# Altium PCB Baskılı_Devre_Proje_2.PcbDoc
Units mm, origin at the board's own origin, x right, y up, seen from the top; angles counter-clockwise.
Board outline 50 x 44.43 mm, 2 copper layers (Top Layer, Bottom Layer); 21 components, 13 nets, 51 pads, 132 vias.
Unrouted connection lines stored in the file: 15.
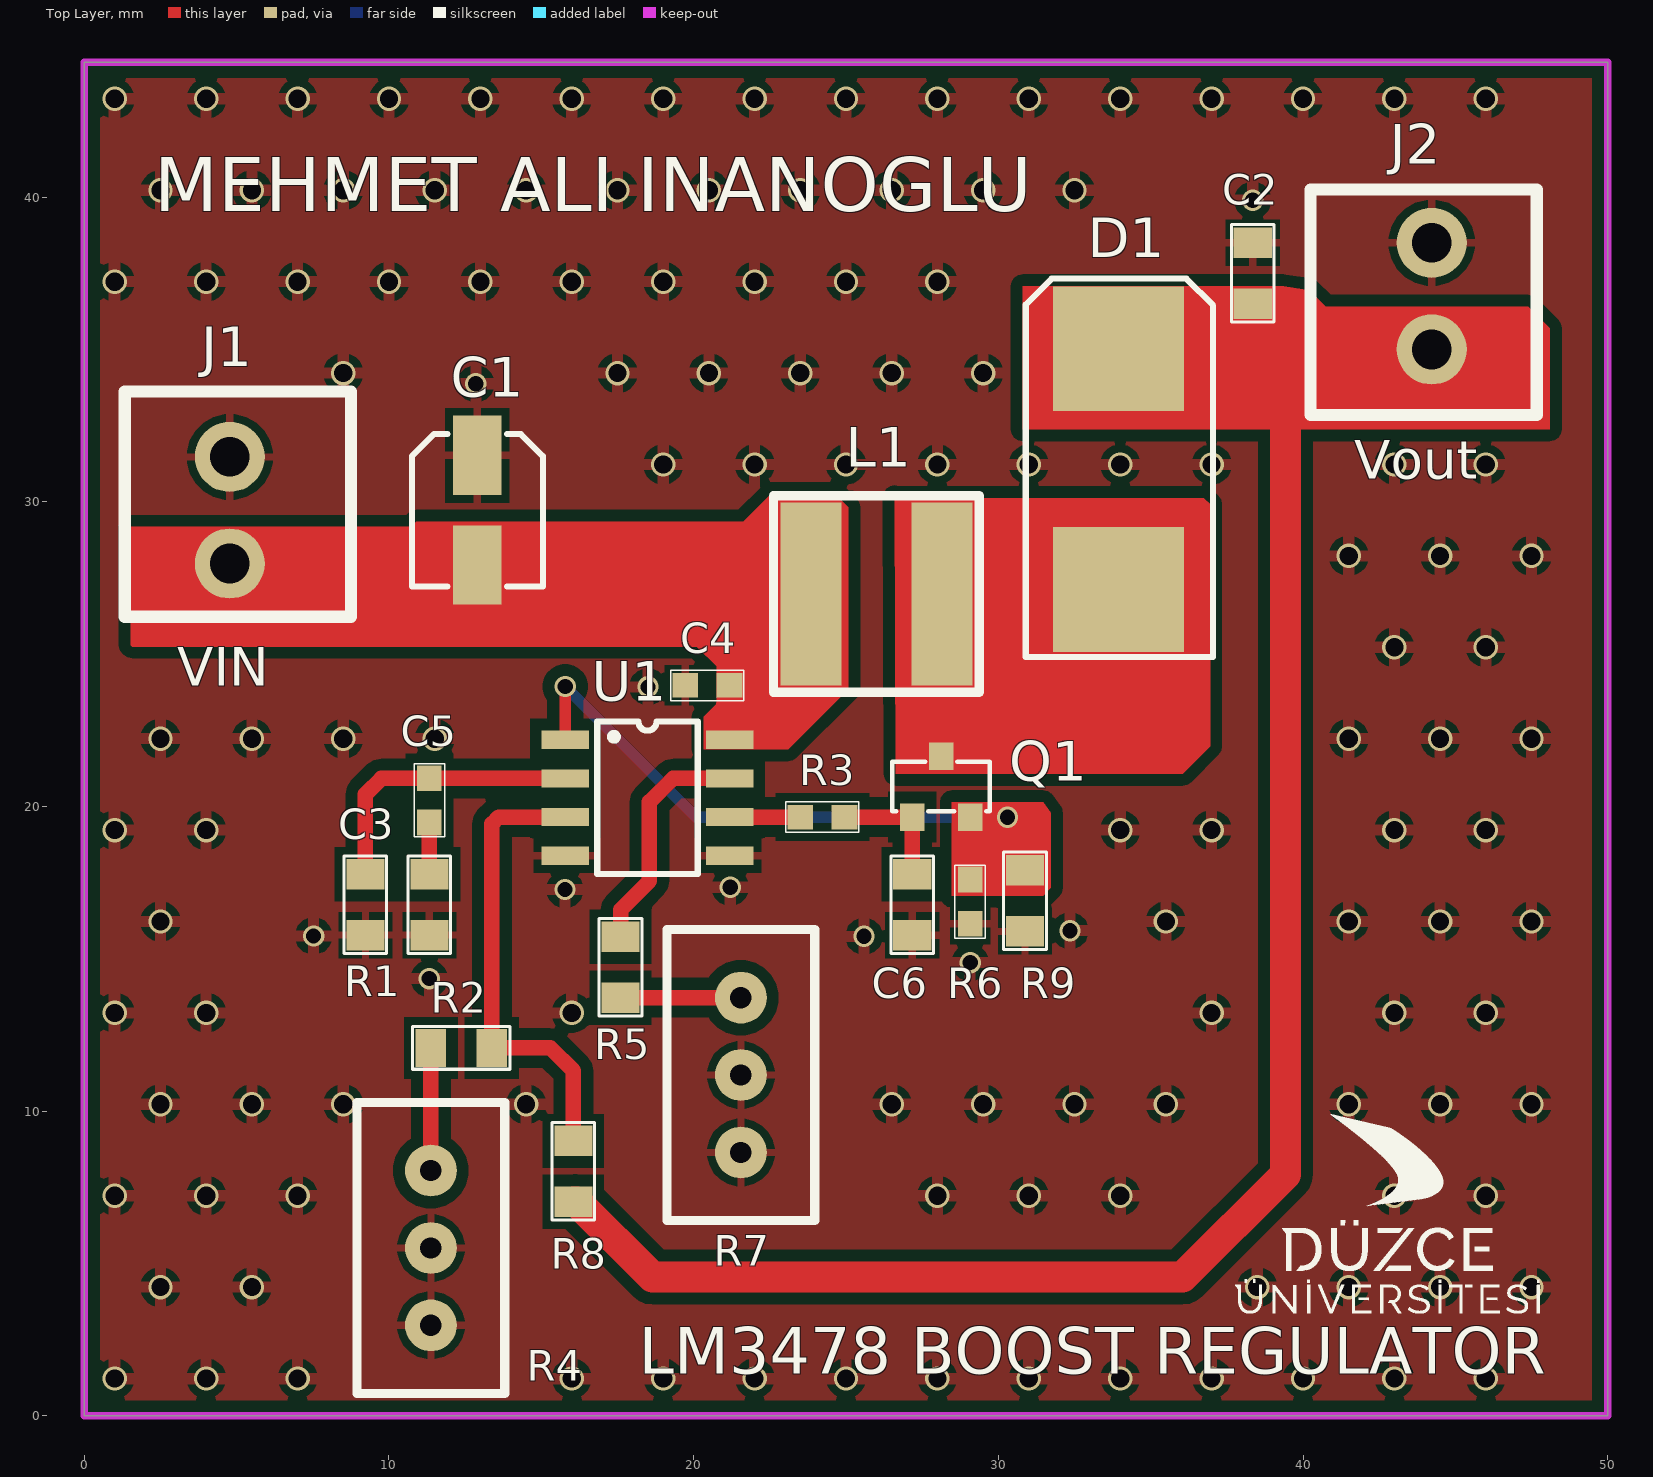
[diagram p0: Top Layer view]
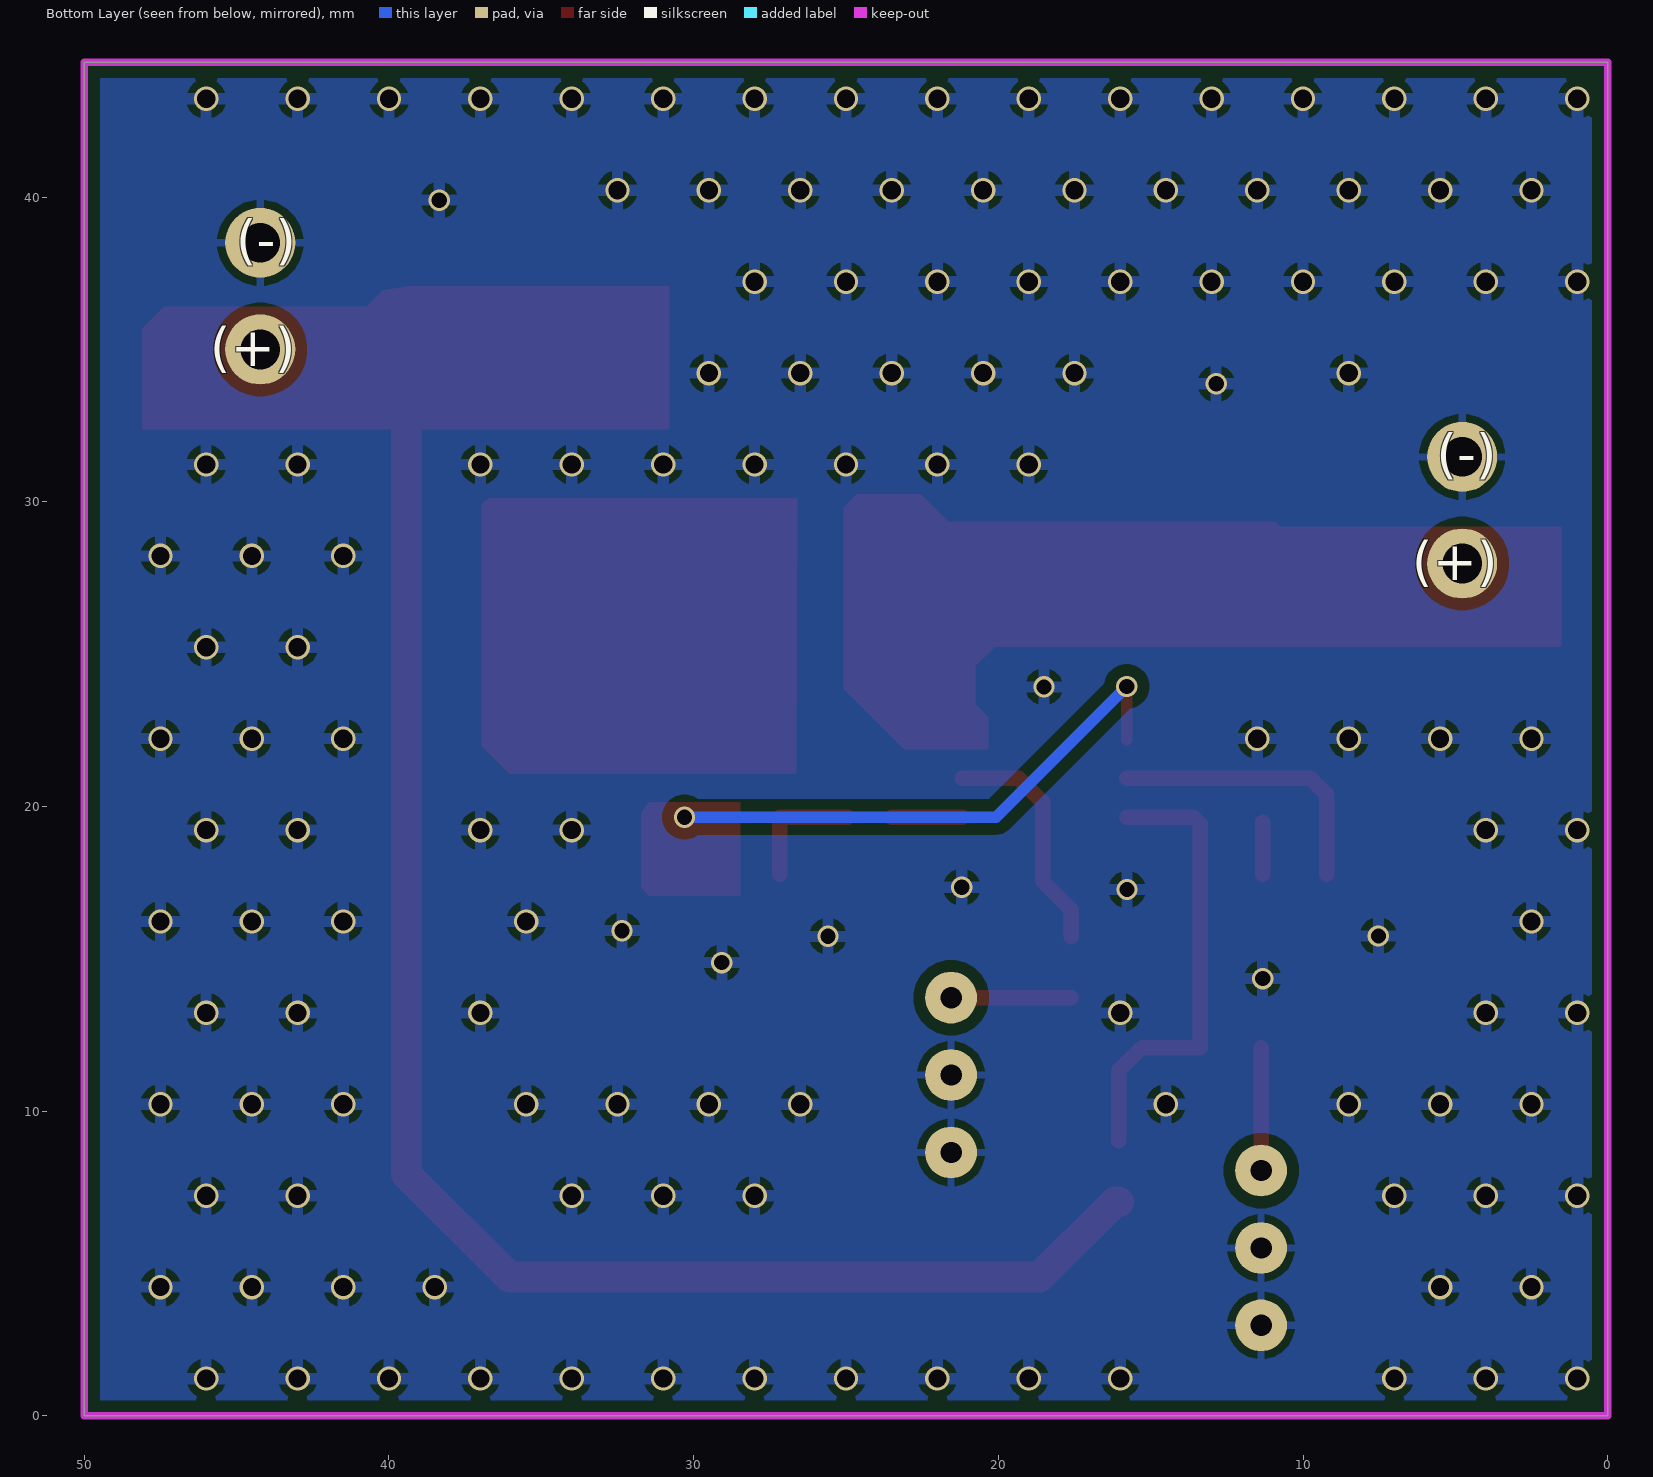
[diagram p1: Bottom Layer view, seen from below]
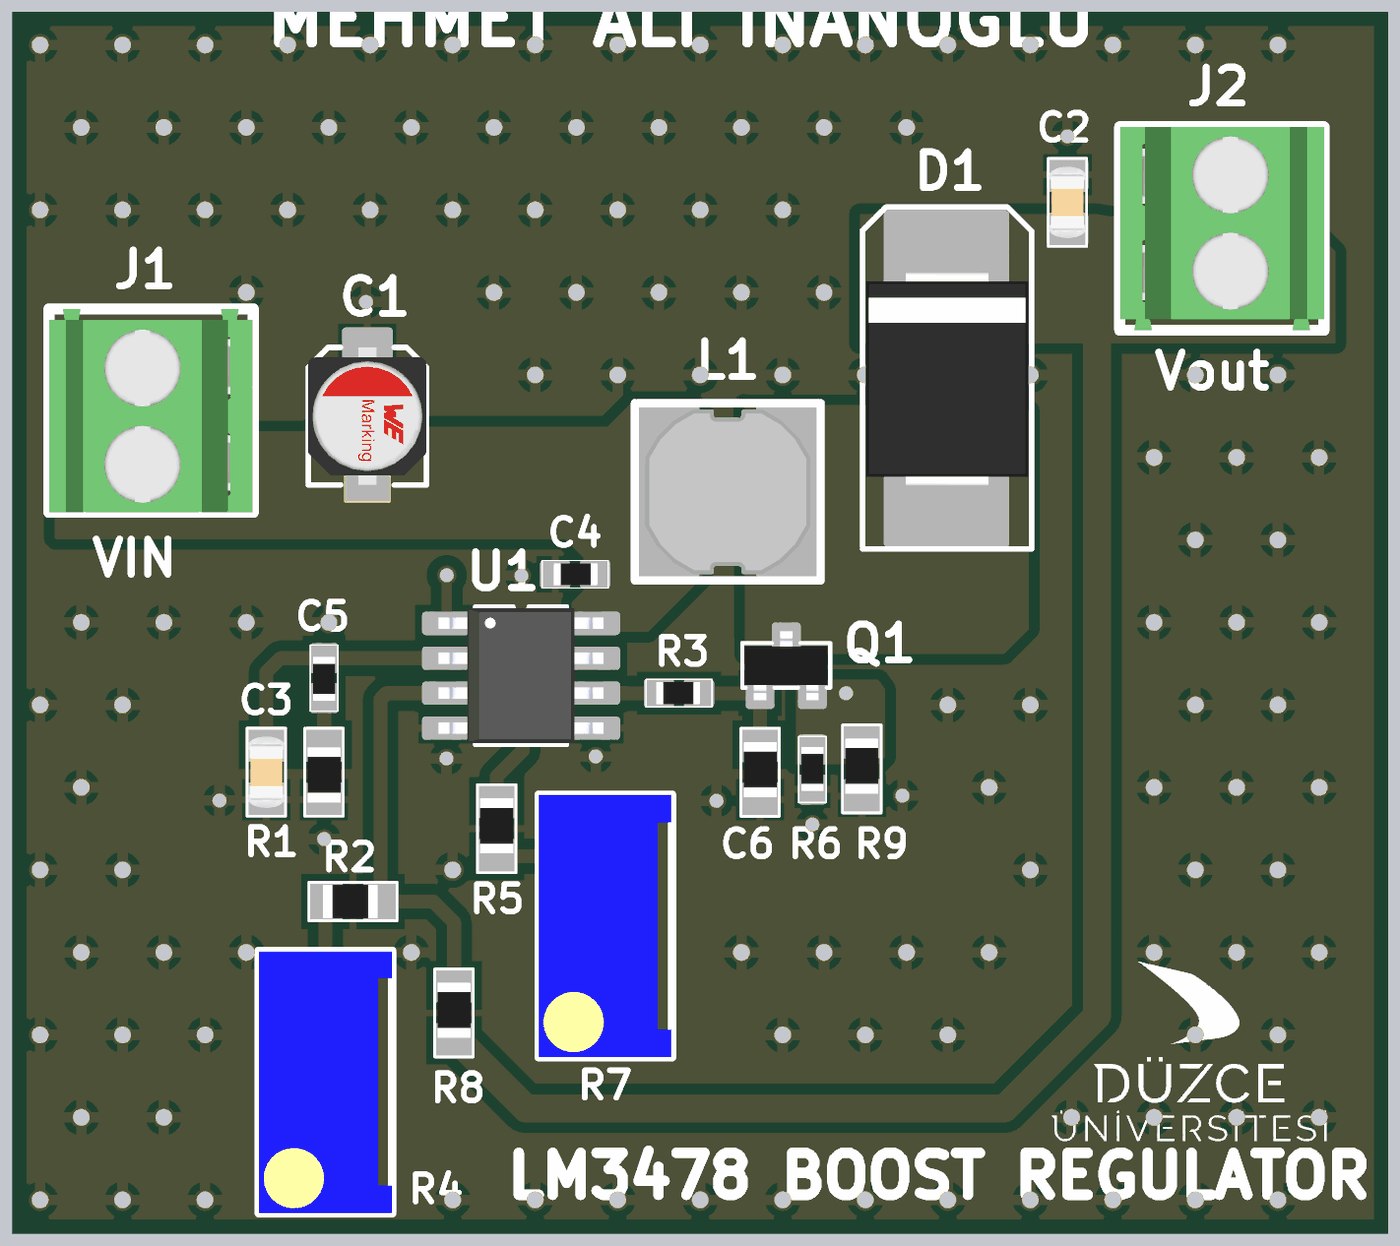
[diagram p2: 3D render of the assembled board from above, using the file's embedded part models]

## Layer stack, top to bottom
Top Solder: solder mask 0.0102, Solder Resist, Dk 3.5
Top Layer: signal copper 0.0356
Dielectric 1: dielectric 0.32, FR-4, Dk 4.8
Bottom Layer: signal copper 0.0356
Bottom Solder: solder mask 0.0102, Solder Resist, Dk 3.5

## Board outline
0,0 50,0 50,44.425 0,44.425

## Design rules (kind name [scope] priority, off if disabled: settings)
Clearance [All] p1: gap=0.381 ignorepadtopadclearanceinfootprint=TRUE except(0: Arc-Text Track-Text SMDPad-Text THPad-Text Via-Text Fill-Text Poly-Text Region-Text Text-Text Text-Hole; 0.203: SMDPad-SMDPad SMDPad-THPad THPad-THPad; 0.229: Arc-Fill Arc-Hole Track-Fill Track-Hole SMDPad-Fill SMDPad-Hole THPad-Fill THPad-Hole Via-Fill Via-Hole Fill-Fill Fill-Hole Poly-Hole Region-Hole; 0.254: Arc-Arc Arc-Track Arc-SMDPad Arc-THPad Arc-Via Track-Track Track-SMDPad Track-THPad Track-Via SMDPad-Via THPad-Via Via-Via)
MinimumSolderMaskSliver [All] p1: minsoldermaskwidth=0.127
NetAntennae [All] p1: netantennaetolerance=0.254
PasteMaskExpansion [All] p1: expansion=0.127
PlaneClearance [All] p1: clearance=0.762
PlaneConnect [All] p1: planeconnectstyle=Relief reliefexpansion=0.381 reliefentries=4 reliefconductorwidth=0.381 reliefairgap=0.254
PolygonConnect [All] p1: connectstyle=Relief reliefconductorwidth=0.381 reliefentries=4 polygonreliefangle="90 Angle" airgapwidth=0.254
RoutingCorners [All] p1: cornerstyle=45-Degree minsetback=2.032 maxsetback=2.032
RoutingVias [All] p1: holewidth=0.3 width=0.5 viastyle="Through Hole" minholewidth=0.25 minwidth=0.4 maxholewidth=0.5 maxwidth=1
SMDEntry [All] p1: side=TRUE corner=TRUE anyangle=FALSE
SMDToCorner [All] p1: distance=150000
SMDToPlane [All] p1: distance=150000
SilkToSilkClearance [All] p1: silktosilkclearance=0
SilkToSolderMaskClearance [IsPad] p1: minsilkscreentomaskgap=0 clearancetoexposedcopper=TRUE
SolderMaskExpansion [All] p1: expansion=0.05 istentingtop=FALSE
UnRoutedNet [All] p1: checkbadconnections=TRUE
Width [All] p1: maxlimit=1.778 minlimit=0.203 preferedwidth=0.279 minimp=50.000000 maximp=50.000000 favimp=50.000000
21 further rules are at their usual default settings.

## Components (designator, comment, footprint, x,y, rotation, side; value= is the part's Value field where it differs from the comment)
C1 "10uF" "Radial, Can - SMD" 12.9,29.725 r90 top
C2 "22UF" "0805 CAP SER" 38.35,37.5 r180 top
C3 "1000pF" "0805 CAP SER" 9.225,16.778 r180 top value=1nF
C4 "0.1uF" "0603 CAP SER" 20.45,23.975 r270 top value=100nF
C5 "15nF" "0603 CAP SER" 11.325,20.2 r180 top
C6 "0.1uF" "0603 CAP SER" 29.075,16.875 r0 top value=100nF
D1 "Diode 20 V 5A Surface Mount SMC" "DO-214AB/SMC (Diode)" 33.95,31.075 r90 top
J1 "TERM BLK 2POS SIDE ENT 3.5MM PCB" "2P 3.5MM TERMİNAL BLOCK" 4.775,29.725 r270 top
J2 "TERM BLK 2POS SIDE ENT 3.5MM PCB" "2P 3.5MM TERMİNAL BLOCK" 44.225,36.75 r90 top
L1 "10uH" SRN6045-100M 26,26.975 r0 top
Q1 "N-Channel 30 V 4.4A (Ta) 1.25W (Ta) Surface Mount SOT-23" SOT-23 28.125,20.65 r0 top
R1 "3.3k" "0805 RES" 11.325,16.778 r180 top value=3.3kR
R2 "20k" "0805 RES" 12.375,12.075 r90 top
R3 "5R" "0603 RES" 24.225,19.65 r90 top
R4 "5K" TRİMMER 11.375,5.51 r270 top
R5 "71.5K" "0805 RES" 17.6,14.725 r0 top
R6 "100k" "0805 RES" 27.175,16.775 r0 top value=100kR
R7 "10k" TRİMMER 21.55,11.185 r270 top value=10kR
R8 "180k" "0805 RES" 16.05,8.025 r0 top
R9 "80mR" "0805 RES" 30.875,16.9 r0 top
U1 "IC REG CTRLR MULT TOPOLOGY 8SOIC" 8-SOİC 18.485,20.287 r0 top

## Footprints (in the part's own frame and the unit in brackets; to place one, negate y for a bottom-side part, rotate by r counter-clockwise, add the part's x,y. Pads: shape width x height; smd on the part's side, far side on the other; paste and mask are expansions set on the pad)
"2P 3.5MM TERMİNAL BLOCK" [mm]
  round 2.3 hole 1.3 mask+0.05: 1(-1.75,0) 2(1.75,0)
  silkscreen extent -3.9,-3.45 3.5,3.98, body extent -3.9,-3.45 3.5,3.95, height 8.5
8-SOİC [mm]
  rect 1.55x0.6 smd mask+0.05: 1(-2.7,1.905) 2(-2.7,0.635) 3(-2.7,-0.635) 4(-2.7,-1.905) 5(2.7,-1.905) 6(2.7,-0.635) 7(2.7,0.635) 8(2.7,1.905)
  silkscreen extent -1.65,-2.5 1.65,2.5, body extent -3,-2.45 3,2.45, height 1.75
"0603 CAP SER" [mm]
  rect 0.8x0.85 smd mask+0.05: 1(0,0.725) 2(0,-0.725)
  silkscreen extent -0.5,-1.2 0.5,1.2, body extent -0.4,-0.78 0.4,0.82, height 0.45
"0603 RES" [mm]
  rect 0.8x0.85 smd mask+0.05: 1(0,0.725) 2(0,-0.725)
  silkscreen extent -0.5,-1.2 0.5,1.2, body extent -0.4,-0.78 0.4,0.82, height 0.45
"0805 CAP SER" [mm]
  rect 1.25x1 smd mask+0.05: 1(0,1) 2(0,-1)
  silkscreen extent -0.7,-1.6 0.7,1.6, body extent -0.68,-1.3 0.68,1.3, height 0.9
"0805 RES" [mm]
  rect 1.25x1 smd mask+0.05: 1(0,1) 2(0,-1)
  silkscreen extent -0.7,-1.6 0.7,1.6, body extent -0.6,-0.9 0.6,1.1, height 0.55
"DO-214AB/SMC (Diode)" [mm]
  rect 4.1x4.3 smd mask+0.05: 1(-3.95,0) 2(3.95,0)
  silkscreen extent -6.17,-3.1 6.25,3.05, body extent -3.9,-2.98 3.9,2.92, height 2.5
"Radial, Can - SMD" [mm]
  rect 2.6x1.6 smd paste-2539.97 mask+0.05: 1(-1.8,0)
  rect 2.6x1.6 smd mask+0.05: 2(1.8,0)
  silkscreen extent -2.5,-2.15 2.5,2.15, body extent -2.5,-2.15 2.5,2.15, height 5.35
SOT-23 [mm]
  rect 0.8x0.9 smd mask+0.05: D(0,1) G(-0.95,-1) S(0.95,-1)
  silkscreen extent -1.6,-0.8 1.6,0.82, body extent -1.5,-1.25 1.5,1.25, height 1.1
SRN6045-100M [mm]
  rect 2x6 smd mask+0.05: 1(-2.15,0) 2(2.15,0)
  silkscreen extent -3.37,-3.22 3.37,3.22, body extent -3,-3 3,3, height 4.5
TRİMMER [mm]
  round 1.7 hole 0.7 mask+0.05: 1(-2.54,0) 2(0,0) 3(2.54,0)
  silkscreen extent -4.77,-2.42 4.77,2.42, body extent -4.76,-2.42 4.76,2.41, height 11.55

## Part data
C1: library part "CAP ALUM 10UF 20% 16V SMD", "WCAP-ASLI Aluminum Electrolytic Capacitors", Case/Package=Radial, ESR (Equivalent Series Resistance)=1.66693R, Leakage Current=3uA, Manufacturer="Wurth Electronics", Manufacturer Part Number=865080340001, Max Operating Temperature=105°C, Min Operating Temperature=-55°C, Package Quantity=1, Ripple Current=80mA, Supplier Part Number=710-865080340001, Tolerance=20%, Voltage Rating=16V, Insulation Resistance=5.33333MR, Category="Aluminum Electrolytic Capacitors", ComponentLink1Description=http://www.farnell.com/datasheets/1880118.pdf?src-supplier=Farnell, ComponentLink1URL=http://www.farnell.com/datasheets/1880118.pdf?src-supplier=Farnell, ComponentLink2Description=http://www.farnell.com/datasheets/1880118.pdf?src-supplier=Element14, ComponentLink2URL=http://www.farnell.com/datasheets/1880118.pdf?src-supplier=Element14, ComponentLink3Description=http://www.farnell.com/datasheets/1880118.pdf?src-supplier=Newark, ComponentLink3URL=http://www.farnell.com/datasheets/1880118.pdf?src-supplier=Newark, ComponentLink4Description=https://katalog.we-online.de/pbs/datasheet/865080340001.pdf?src-supplier=Digikey, ComponentLink4URL=https://katalog.we-online.de/pbs/datasheet/865080340001.pdf?src-supplier=Digikey, Diameter=4mm, Height=5.5mm, Height - Seated (Max)=0.217inch, Lead Free="Lead Free", Length=5.5mm, Mounting Technology="Surface Mount", Packaging="Cut Tape", Pricing="1=0,18, 10=0,18, 50=0,156, 100=0,135, 1000=0,1, 10000=0,099 (USD)", Reach SVHC Compliant=Unknown, Ripple Current (AC)=80mA, RoHS=Yes, RoHS Compliant=Yes, Series=WCAP-ASLI, Stock=90035, Supplier=Mouser, Voltage Rating (DC)=16V, Width=4.3mm, Impedance=2.2R
C2: library part "CAP CER 22UF 16V X5R 0805", "Multilayer Ceramic Capacitor, 22 uF, 16 V, ± 10%, X5R, 0805 [2012 Metric]", Manufacturer=Samsung, Manufacturer Part Number=CL21A226KOQNNNG, Supplier Part Number=187-CL21A226KOQNNNG, Voltage Rating (DC)=16V, Category="Ceramic Capacitors", ComponentLink1Description=https://datasheet.ciiva.com/25727/cl21a226koqnnng-25727154.pdf?src-supplier=Digikey, ComponentLink1URL=https://datasheet.ciiva.com/25727/cl21a226koqnnng-25727154.pdf?src-supplier=Digikey, Height=1.45mm, Material=4241ConductorMaterial, Pricing="1=0,31, 10=0,193, 50=0,193, 100=0,12, 1000=0,091, 10000=0,061 (USD)", RoHS=Yes, Stock=107435, Supplier=Mouser
C3: library part "CAP CER 1000PF 16V X7R 0805", "Multilayer Ceramic Capacitors MLCC - SMD/SMT 16V 1000pF X7R 0805 10%", Case Code (Metric)=2012, Case Code (Imperial)=0805, Dielectric=X7R, Dielectric Material=4241ConductorMaterial, Manufacturer=KEMET, Manufacturer Part Number=C0805C102K4RACTU, Max Operating Temperature=125°C, Min Operating Temperature=-55°C, Package Quantity=1, Supplier Part Number=80-C0805C102K4R, Temperature Coefficient=30ppm/°C, Tolerance=10%, Voltage Rating=16V, Case/Package=0805, Category="Ceramic Capacitors", ComponentLink1Description=http://www.farnell.com/datasheets/2746322.pdf?src-supplier=Farnell, ComponentLink1URL=http://www.farnell.com/datasheets/2746322.pdf?src-supplier=Farnell, ComponentLink2Description=http://www.mouser.com/ds/2/212/KEM_C1002_X7R_SMD-1102033.pdf?src-supplier=Mouser, ComponentLink2URL=http://www.mouser.com/ds/2/212/KEM_C1002_X7R_SMD-1102033.pdf?src-supplier=Mouser, ComponentLink3Description=http://www.farnell.com/datasheets/1828800.pdf?src-supplier=Newark, ComponentLink3URL=http://www.farnell.com/datasheets/1828800.pdf?src-supplier=Newark, ComponentLink4Description=https://datasheet.octopart.com/C0805C102K4RACTU-KEMET-datasheet-130256537.pdf?src-supplier=Element14, ComponentLink4URL=https://datasheet.octopart.com/C0805C102K4RACTU-KEMET-datasheet-130256537.pdf?src-supplier=Element14, ComponentLink5Description=https://api.kemet.com/component-edge/download/datasheet/C0805C102K4RACTU.pdf?src-supplier=Digikey, ComponentLink5URL=https://api.kemet.com/component-edge/download/datasheet/C0805C102K4RACTU.pdf?src-supplier=Digikey, ComponentLink6Description=http://www.farnell.com/datasheets/2746322.pdf?src-supplier=Newark, ComponentLink6URL=http://www.farnell.com/datasheets/2746322.pdf?src-supplier=Newark, ComponentLink7Description=http://capacitoredge.kemet.com/capedge2/DataSheet?pn=C0805C102K4RACTU&src-supplier=Avnet, ComponentLink7URL=http://capacitoredge.kemet.com/capedge2/DataSheet?pn=C0805C102K4RACTU&src-supplier=Avnet, ComponentLink8Description=https://datasheet.octopart.com/C0805C102K4RACTU-KEMET-datasheet-136484009.pdf?src-supplier=TME, ComponentLink8URL=https://datasheet.octopart.com/C0805C102K4RACTU-KEMET-datasheet-136484009.pdf?src-supplier=TME, Dissipation Factor=5%, Height=0.78mm, Lead Pitch=0.75mm, Length=0.079inch, Material=4241ConductorMaterial, Mounting Technology="Surface Mount", Packaging="Tape and Reel", Pricing="1=0,29, 10=0,18, 50=0,18, 100=0,103, 1000=0,07, 10000=0,034 (USD)", Reach SVHC Compliant=No, RoHS=Yes, RoHS Compliant=Yes, Series=C, Stock=11009, Supplier=Mouser, Termination=SMD/SMT, Thickness=0.035inch, Voltage Rating (DC)=16V, Width=0.049inch
C4 C6: library part "CAP CER 0.1UF 16V X7R 0603", "100nF ±10% 16V X7R 0603 Multilayer Ceramic Capacitors MLCC - SMD/SMT RoHS", Case Code (Metric)=1608, Case Code (Imperial)=0603, Dielectric=X7R, Manufacturer=KEMET, Manufacturer Part Number=C0603C104K4RACTU, Max Operating Temperature=125°C, Min Operating Temperature=-55°C, Package Quantity=4000, Supplier Part Number=80-C0603C104K4R, Temperature Coefficient=30ppm/°C, Tolerance=10%, Voltage=16V, Case/Package=0603, Category="Ceramic Capacitors", ComponentLink1Description=https://datasheet.ciiva.com/22749/kem-c1002-x7r-smd-22749657.pdf?src-supplier=Element14, ComponentLink1URL=https://datasheet.ciiva.com/22749/kem-c1002-x7r-smd-22749657.pdf?src-supplier=Element14, ComponentLink2Description=https://datasheet.ciiva.com/14589/70095383-14589014.pdf?src-supplier=Allied+Electronics, ComponentLink2URL=https://datasheet.ciiva.com/14589/70095383-14589014.pdf?src-supplier=Allied+Electronics, ComponentLink3Description=https://datasheet.ciiva.com/5413/kem-c1002-x7r-smd-5413791.pdf?src-supplier=Mouser, ComponentLink3URL=https://datasheet.ciiva.com/5413/kem-c1002-x7r-smd-5413791.pdf?src-supplier=Mouser, ComponentLink4Description=https://datasheet.ciiva.com/18192/getdatasheetpartid-330584-18192695.pdf?src-supplier=Verical, ComponentLink4URL=https://datasheet.ciiva.com/18192/getdatasheetpartid-330584-18192695.pdf?src-supplier=Verical, Construction=Flat, Depth=0.8mm, Dissipation Factor=3.5%, Height=0.8mm, Lead Free="Lead Free", Lead Pitch=0.7mm, Length=1.6mm, Material=Ceramic, Mounting Technology="Surface Mount,PCB", Packaging="Tape and Reel", Pricing="1=0,1, 10=0,021, 50=0,021, 100=0,02, 1000=0,018, 10000=0,013 (USD)", Radiation Hardening=No, Reach SVHC Compliant=No, RoHS=Yes, RoHS Compliant=Yes, Series="SMD Comm X7R", Stock=434790, Supplier=Mouser, Termination=SMD/SMT, Voltage Rating=16V, Voltage Rating (AC)=16V, Voltage Rating (DC)=16V, Weight=7.1E-05oz, Width=0.8mm
C5: library part "CAP CER 0603 15NF 16V X7R 10%", "0.015 µF ±10% 16V Ceramic Capacitor X7R 0603 (1608 Metric)", Manufacturer=KEMET, Manufacturer Part Number=C0603C153K4RECTU, Supplier Part Number=80-C0603C153K4RECTU, Pricing="1=0,1, 10=0,054, 50=0,054, 100=0,032, 1000=0,021, 10000=0,014 (USD)", RoHS=Yes, RoHS Compliant=Yes, Stock=9235, Supplier=Mouser
D1: library part "DIODE SCHOTTKY 20V 5A SMC", "VR=20V IF=5A 300pF", Manufacturer=Diodes, Manufacturer Part Number=B520C-13-F, Supplier Part Number=621-B520C-F, Category="Rectifier Diodes", ComponentLink1Description=https://datasheet.ciiva.com/26949/getdatasheetpartid-213968-26949361.pdf?src-supplier=Verical, ComponentLink1URL=https://datasheet.ciiva.com/26949/getdatasheetpartid-213968-26949361.pdf?src-supplier=Verical, ComponentLink2Description=https://datasheet.ciiva.com/30479/0900766b8104afce-30479360.pdf?src-supplier=Rs, ComponentLink2URL=https://datasheet.ciiva.com/30479/0900766b8104afce-30479360.pdf?src-supplier=Rs, ComponentLink3Description=https://datasheet.ciiva.com/914/ds13012-914950.pdf?src-supplier=Digikey, ComponentLink3URL=https://datasheet.ciiva.com/914/ds13012-914950.pdf?src-supplier=Digikey, ComponentLink4Description=https://datasheet.ciiva.com/914/ds13012-914951.pdf?src-supplier=Digikey, ComponentLink4URL=https://datasheet.ciiva.com/914/ds13012-914951.pdf?src-supplier=Digikey, ComponentLink5Description=https://datasheet.ciiva.com/8301/ds13012-8301455.pdf?src-supplier=Avnet, ComponentLink5URL=https://datasheet.ciiva.com/8301/ds13012-8301455.pdf?src-supplier=Avnet, ComponentLink6Description=https://datasheet.ciiva.com/16210/ds13012-16210687.pdf?src-supplier=Future+Electronics, ComponentLink6URL=https://datasheet.ciiva.com/16210/ds13012-16210687.pdf?src-supplier=Future+Electronics, Pricing="1=0,61, 10=0,416, 50=0,416, 100=0,329, 1000=0,306, 10000=0,306 (USD)", RoHS=Yes, Stock=2672, Supplier=Mouser
J1 J2: "Conn Terminal Block 2 POS 3.5mm Solder ST Thru-Hole 10A Box", Color=Blue,Green, Current=10A, Manufacturer="Wurth Electronics", Manufacturer Part Number=691214110002, Max Operating Temperature=105°C, Min Operating Temperature=-40°C, Supplier Part Number=732-2747-ND, Voltage=300V, Category="Terminal Blocks", ComponentLink1Description=https://datasheet.ciiva.com/824/6912141100xx-824001.pdf?src-supplier=Digikey, ComponentLink1URL=https://datasheet.ciiva.com/824/6912141100xx-824001.pdf?src-supplier=Digikey, ComponentLink2Description=https://datasheet.ciiva.com/48693/001088618-da-01-en-wr-tbl-terminal-block2141-691214110002-48693195.pdf?src-supplier=Conrad, ComponentLink2URL=https://datasheet.ciiva.com/48693/001088618-da-01-en-wr-tbl-terminal-block2141-691214110002-48693195.pdf?src-supplier=Conrad, Contact Material=Brass, Contact Plating=Brass,Tin, Current Rating=10A, Height=12.2mm, Housing Material=PA66, Length=7.4mm, Mounting Technology="Through Hole", Number of Contacts=2, Number of Levels=1, Number of Positions Per Level=2, Number of Rows=1NUMBER, Pitch=3.5mm, Plating=Brass,Steel, Pricing="1=0,79, 10=0,709, 50=0,612, 100=0,5481, 500=0,5166, 1400=0,4842 (USD)", Reach SVHC Compliant=Unknown, RoHS=Yes, RoHS Compliant=Yes, Series="WR-TBL Series 2141", Stock=3392, Stripping Length=-6mm, Supplier=Digikey, Termination=Screw, Voltage Rating=300V, Width=7.9mm, Wire Gauge (Max)=24AWG, Wire Gauge (Min)=16AWG, Wire/Cable Gauge=24AWG
L1: library part "FIXED IND 10UH 2.5A 58.6MOHM SMD", "Inductor Power Semi-Shielded Wirewound 10uH 20% 100KHz 17Q-Factor Ferrite 2.5A 58.6mOhm DCR T/R", Manufacturer=Bourns, Manufacturer Part Number=SRN6045-100M, Supplier Part Number=652-SRN6045-100M, Category="Fixed Inductors", ComponentLink1Description=https://datasheet.ciiva.com/11802/0900766b80fe1f3e-11802575.pdf?src-supplier=Rs, ComponentLink1URL=https://datasheet.ciiva.com/11802/0900766b80fe1f3e-11802575.pdf?src-supplier=Rs, ComponentLink2Description=https://datasheet.ciiva.com/28561/1875285-28561101.pdf?src-supplier=Element14, ComponentLink2URL=https://datasheet.ciiva.com/28561/1875285-28561101.pdf?src-supplier=Element14, ComponentLink3Description=https://datasheet.ciiva.com/17113/70231653-17113272.pdf?src-supplier=Allied+Electronics, ComponentLink3URL=https://datasheet.ciiva.com/17113/70231653-17113272.pdf?src-supplier=Allied+Electronics, ComponentLink4Description=https://datasheet.ciiva.com/7849/1875285-7849518.pdf?src-supplier=Element14, ComponentLink4URL=https://datasheet.ciiva.com/7849/1875285-7849518.pdf?src-supplier=Element14, ComponentLink5Description=https://datasheet.ciiva.com/6689/srn6045-6689370.pdf?src-supplier=Digikey, ComponentLink5URL=https://datasheet.ciiva.com/6689/srn6045-6689370.pdf?src-supplier=Digikey, ComponentLink6Description=https://datasheet.ciiva.com/6689/srn6045-6689372.pdf?src-supplier=Digikey, ComponentLink6URL=https://datasheet.ciiva.com/6689/srn6045-6689372.pdf?src-supplier=Digikey, ComponentLink7Description=https://datasheet.ciiva.com/6689/srn6045-6689374.pdf?src-supplier=Digikey, ComponentLink7URL=https://datasheet.ciiva.com/6689/srn6045-6689374.pdf?src-supplier=Digikey, ComponentLink8Description=https://datasheet.ciiva.com/8512/srn6045-8512981.pdf?src-supplier=Avnet, ComponentLink8URL=https://datasheet.ciiva.com/8512/srn6045-8512981.pdf?src-supplier=Avnet, ComponentLink9Description=https://datasheet.ciiva.com/48691/001056442-da-01-en-mag-abg-leist-ind-srn6045-100m-10uh-smd-48691818.pdf?src-supplier=Conrad, ComponentLink9URL=https://datasheet.ciiva.com/48691/001056442-da-01-en-mag-abg-leist-ind-srn6045-100m-10uh-smd-48691818.pdf?src-supplier=Conrad, Pricing="1=0,5, 10=0,357, 50=0,357, 100=0,3, 1000=0,212, 10000=0,191 (USD)", RoHS=Yes, Stock=21971, Supplier=Mouser
Q1: library part "SOT-23, MOSFET", "1.25W/30V/4.4A/MOSFET/SOT-23/SINGLE N-ch", Manufacturer="Pan Jit", Manufacturer Part Number=PJA3406_R1_00001, Supplier Part Number=241-PJA3406_R1_00001, Pricing="1=0,28, 10=0,189, 50=0,189, 100=0,098, 1000=0,088, 10000=0,059 (USD)", RoHS=Yes, RoHS Compliant=Yes, Stock=438222, Supplier=Mouser
R1: library part "RES 3.3K OHM 1% 1/8W 0805", "SMD Chip Resistor, 3.3 kOhm, ï¿½ 1%, 125 mW, 0805 [2012 Metric], Thick Film, General Purpose", Case Code (Metric)=2012, Case Code (Imperial)=0805, Manufacturer=Yageo, Manufacturer Part Number=RC0805FR-073K3L, Max Operating Temperature=155°C, Max Power Dissipation=125mW, Min Operating Temperature=-55°C, Package Quantity=1, Resistance Tolerance=1%, Resistor Type="Thick Film", Supplier Part Number=603-RC0805FR-073K3L, Temperature Coefficient=100ppm/°C, Voltage Rating=150V, Case/Package=0805, Category="Chip SMD Resistors", ComponentLink1Description=https://datasheet.ciiva.com/46447/444164-46447579.pdf?src-supplier=Element14, ComponentLink1URL=https://datasheet.ciiva.com/46447/444164-46447579.pdf?src-supplier=Element14, ComponentLink2Description=https://datasheet.ciiva.com/2457/pyu-r-int-thick-7-2457993.pdf?src-supplier=Digikey, ComponentLink2URL=https://datasheet.ciiva.com/2457/pyu-r-int-thick-7-2457993.pdf?src-supplier=Digikey, ComponentLink3Description=https://datasheet.ciiva.com/2457/pyu-r-int-thick-7-2457994.pdf?src-supplier=Digikey, ComponentLink3URL=https://datasheet.ciiva.com/2457/pyu-r-int-thick-7-2457994.pdf?src-supplier=Digikey, ComponentLink4Description=https://datasheet.ciiva.com/2457/pyu-r-int-thick-7-2457992.pdf?src-supplier=Digikey, ComponentLink4URL=https://datasheet.ciiva.com/2457/pyu-r-int-thick-7-2457992.pdf?src-supplier=Digikey, ComponentLink5Description=https://datasheet.ciiva.com/12577/rc0805-12577341.pdf?src-supplier=Mouser, ComponentLink5URL=https://datasheet.ciiva.com/12577/rc0805-12577341.pdf?src-supplier=Mouser, ComponentLink6Description=https://datasheet.ciiva.com/7941/444164-7941782.pdf?src-supplier=Element14, ComponentLink6URL=https://datasheet.ciiva.com/7941/444164-7941782.pdf?src-supplier=Element14, ComponentLink7Description=https://datasheet.ciiva.com/7941/444164-7941783.pdf?src-supplier=Element14, ComponentLink7URL=https://datasheet.ciiva.com/7941/444164-7941783.pdf?src-supplier=Element14, ComponentLink8Description=https://datasheet.ciiva.com/16747/rc0805-16747115.pdf?src-supplier=Future+Electronics, ComponentLink8URL=https://datasheet.ciiva.com/16747/rc0805-16747115.pdf?src-supplier=Future+Electronics, Features="Moisture Resistant", Height=0.024inch, Lead Free="Lead Free", Length=0.079inch, Number of Terminations=2, Packaging="Tape and Reel", Power Rating=125mW, Pricing="1=0,1, 10=0,012, 50=0,012, 100=0,01, 1000=0,008, 10000=0,004 (USD)", Reach SVHC Compliant=Unknown, RoHS=Yes, RoHS Compliant=Yes, Series=RC, Stock=140040, Supplier=Mouser, Termination=SMD/SMT, Tolerance=1%, Voltage Rating (AC)=150V, Weight=0.000194oz, Width=0.049inch
R2: library part "RES 20K OHM 1% 1/8W 0805", "125Mw Thick Film Resistors 100Ppm/ 1% 20K 0805 Chip Resistor Surface Mount Rohs", Manufacturer=Yageo, Manufacturer Part Number=RC0805FR-0720KL, Supplier Part Number=603-RC0805FR-0720KL, Voltage Rating (DC)=150V, Category="Chip SMD Resistors", ComponentLink1Description=https://datasheet.ciiva.com/46395/444164-46395127.pdf?src-supplier=Element14, ComponentLink1URL=https://datasheet.ciiva.com/46395/444164-46395127.pdf?src-supplier=Element14, ComponentLink2Description=https://datasheet.ciiva.com/12666/rc0805-12666938.pdf?src-supplier=Mouser, ComponentLink2URL=https://datasheet.ciiva.com/12666/rc0805-12666938.pdf?src-supplier=Mouser, ComponentLink3Description=https://datasheet.ciiva.com/15189/getdatasheetpartid-330251-15189927.pdf?src-supplier=Verical, ComponentLink3URL=https://datasheet.ciiva.com/15189/getdatasheetpartid-330251-15189927.pdf?src-supplier=Verical, Lead Free=5697LeadFree, Pins=2NUMBER, Pricing="1=0,1, 10=0,013, 50=0,013, 100=0,01, 1000=0,007, 10000=0,004 (USD)", RoHS=Yes, Stock=343670, Supplier=Mouser
R3: library part "RES 5 OHM 1% 0.4W 0603", "Res Thin Film 0603 5 Ohm 1% 0.4W ±50ppm/C Pad SMD T/R Automotive", Case/Package=345Case, Manufacturer="Stackpole Electronics", Manufacturer Part Number=CSRT0603FT5R00, Max Operating Temperature=155°C, Min Operating Temperature=-55°C, Power Rating=400mW, Supplier Part Number=708-CSRT0603FT5R00, Temperature Coefficient=50ppm/°C, Tolerance=1%, Category="Chip SMD Resistors", Height=550um, Pricing="1=0,22, 10=0,084, 50=0,084, 100=0,059, 1000=0,044, 10000=0,026 (USD)", RoHS=Yes, Stock=3224, Supplier=Mouser
R4: library part "TRIMMER 5K OHM 0.5W PC PIN TOP", "Bourns 3296W-1-502LF 5K 10% Potentiometer Cermet Trimming 3/8\" (3296W Series)", Color=48Colour, Manufacturer=Bourns, Manufacturer Part Number=3296W-1-502LF, Supplier Part Number=652-3296W-1-502LF, Voltage Rating (AC)=300V, Category="Variable Resistors and Potentiometers", Lead Free=5697LeadFree, Pricing="1=2,05, 10=1,54, 50=1,54, 100=1,33, 1000=1,21, 10000=1,1 (USD)", RoHS=Yes, Stock=6667, Supplier=Mouser
R5: library part "RES 71.5K OHM 1% 1/8W 0805", "Res Thick Film 2.0 x 1.2 mm 71.5K Ohm 1% 0.125W(1/8W) 100ppm/ C Molded SMD Paper T/R", Manufacturer=Yageo, Manufacturer Part Number=RC0805FR-0771K5L, Supplier Part Number=603-RC0805FR-0771K5L, Voltage Rating (DC)=150V, Category="Chip SMD Resistors", ComponentLink1Description=https://datasheet.ciiva.com/2457/pyu-r-int-thick-7-2457794.pdf?src-supplier=Digikey, ComponentLink1URL=https://datasheet.ciiva.com/2457/pyu-r-int-thick-7-2457794.pdf?src-supplier=Digikey, ComponentLink2Description=https://datasheet.ciiva.com/2457/pyu-r-int-thick-7-2457795.pdf?src-supplier=Digikey, ComponentLink2URL=https://datasheet.ciiva.com/2457/pyu-r-int-thick-7-2457795.pdf?src-supplier=Digikey, ComponentLink3Description=https://datasheet.ciiva.com/2457/pyu-r-int-thick-7-2457796.pdf?src-supplier=Digikey, ComponentLink3URL=https://datasheet.ciiva.com/2457/pyu-r-int-thick-7-2457796.pdf?src-supplier=Digikey, Lead Free=5697LeadFree, Pricing="1=0,1, 10=0,009, 50=0,009, 100=0,008, 1000=0,007, 10000=0,003 (USD)", RoHS=Yes, Stock=4864, Supplier=Mouser
R6: library part "RES 100K OHM 1% 1/8W 0805", "SMD Chip Resistor, 100 kOhm, ï¿½ 1%, 125 mW, 0805 [2012 Metric], Thick Film, General Purpose", Case Code (Metric)=2012, Case Code (Imperial)=0805, Manufacturer=Yageo, Manufacturer Part Number=RC0805FR-07100KL, Max Operating Temperature=155°C, Max Power Dissipation=125mW, Min Operating Temperature=-55°C, Package Quantity=1, Resistance Tolerance=1%, Resistor Type="Thick Film", Supplier Part Number=603-RC0805FR-07100KL, Temperature Coefficient=100ppm/°C, Voltage Rating=150V, Case/Package=0805, Category="Chip SMD Resistors", ComponentLink1Description=https://datasheet.ciiva.com/11808/0900766b8106beab-11808858.pdf?src-supplier=Rs, ComponentLink1URL=https://datasheet.ciiva.com/11808/0900766b8106beab-11808858.pdf?src-supplier=Rs, ComponentLink2Description=https://datasheet.ciiva.com/7941/1686128-7941677.pdf?src-supplier=Element14, ComponentLink2URL=https://datasheet.ciiva.com/7941/1686128-7941677.pdf?src-supplier=Element14, ComponentLink3Description=https://datasheet.ciiva.com/7660/38627-7660796.pdf?src-supplier=Element14, ComponentLink3URL=https://datasheet.ciiva.com/7660/38627-7660796.pdf?src-supplier=Element14, ComponentLink4Description=https://datasheet.ciiva.com/22747/444164-22747534.pdf?src-supplier=Element14, ComponentLink4URL=https://datasheet.ciiva.com/22747/444164-22747534.pdf?src-supplier=Element14, ComponentLink5Description=https://datasheet.ciiva.com/2457/pyu-r-int-thick-7-2457018.pdf?src-supplier=Digikey, ComponentLink5URL=https://datasheet.ciiva.com/2457/pyu-r-int-thick-7-2457018.pdf?src-supplier=Digikey, ComponentLink6Description=https://datasheet.ciiva.com/2457/pyu-r-int-thick-7-2457019.pdf?src-supplier=Digikey, ComponentLink6URL=https://datasheet.ciiva.com/2457/pyu-r-int-thick-7-2457019.pdf?src-supplier=Digikey, ComponentLink7Description=https://datasheet.ciiva.com/2457/pyu-r-int-thick-7-2457017.pdf?src-supplier=Digikey, ComponentLink7URL=https://datasheet.ciiva.com/2457/pyu-r-int-thick-7-2457017.pdf?src-supplier=Digikey, ComponentLink8Description=https://datasheet.ciiva.com/12667/rc0805-12667001.pdf?src-supplier=Mouser, ComponentLink8URL=https://datasheet.ciiva.com/12667/rc0805-12667001.pdf?src-supplier=Mouser, ComponentLink9Description=https://datasheet.ciiva.com/7941/1697719-7941676.pdf?src-supplier=Element14, ComponentLink9URL=https://datasheet.ciiva.com/7941/1697719-7941676.pdf?src-supplier=Element14, ComponentLink10Description=https://datasheet.ciiva.com/7941/1697719-7941678.pdf?src-supplier=Element14, ComponentLink10URL=https://datasheet.ciiva.com/7941/1697719-7941678.pdf?src-supplier=Element14, ComponentLink11Description=https://datasheet.ciiva.com/16747/rc0805-16747226.pdf?src-supplier=Future+Electronics, ComponentLink11URL=https://datasheet.ciiva.com/16747/rc0805-16747226.pdf?src-supplier=Future+Electronics, Construction=Rectangular, Depth=1.25mm, Features="Moisture Resistant", Height=0.024inch, Lead Free=5697LeadFree, Lead Pitch=0.4mm, Length=0.079inch, Military Standard=Not, Number of Terminations=2, Packaging="Tape and Reel", Pins=2, Power Rating=125mW, Pricing="1=0,1, 10=0,014, 50=0,014, 100=0,011, 1000=0,009, 10000=0,003 (USD)", Reach SVHC Compliant=Unknown, RoHS=Yes, RoHS Compliant=Yes, Series=RC, Stock=405732, Supplier=Mouser, Technology="THICK FILM", Termination=SMD/SMT, Tolerance=1%, Voltage Rating (AC)=150V, Voltage Rating (DC)=150V, Width=0.049inch
R7: library part "TRIMMER 10K OHM 0.5W PC PIN TOP", "1 kOhms .5W, 1/2W PC Pins Through Hole Trimmer Potentiometer Cermet 25. Turn Top Adjustment", Case Code (Metric)=3657CaseCodeMetric, Case Code (Imperial)=3202CaseCodeImperial, Case/Package=345Case, Color=48Colour, Manufacturer=Bourns, Manufacturer Part Number=3296W-1-103LF, Max Operating Temperature=125°C, Max Power Dissipation=500mW, Min Operating Temperature=-55°C, Resistance Tolerance=10%, Resistor Type=Cermet, Supplier Part Number=652-3296W-1-103LF, Temperature Coefficient=100ppm/°C, Voltage Rating (AC)=300V, Insulation Resistance=1GR, Category="Variable Resistors and Potentiometers", Depth=4.83mm, Height=11.55mm, Lead Free=5697LeadFree, Length=9.53mm, Military Standard=Not, Mounting Technology="Through Hole,PCB", Number of Turns=25, Packaging=Rail/Tube, Power Rating=500mW, Pricing="1=2,44, 10=1,85, 50=1,85, 100=1,46, 1000=1,24, 10000=1,1 (USD)", Radiation Hardening=No, Reach SVHC Compliant=No, RoHS=Yes, RoHS Compliant=Yes, Series=3296, Stock=1582, Supplier=Mouser, Taper=Linear, Technology=CERMET, Termination=Pin, Tolerance=10%, Weight=0.03oz, Width=9.53mm
R8: library part "RES 180K OHM 1% 1/8W 0805", "Conn Shrouded Header (4 Sides) HDR 6 POS 2.5mm Solder ST Top Entry Thru-Hole SPOX Bag", Contact Resistance=20mR, Current Rating=3A, Manufacturer=Molex, Manufacturer Part Number=22-03-5065, Max Operating Temperature=105°C, Min Operating Temperature=-40°C, Package Quantity=1, Supplier Part Number=538-22-03-5065, Voltage Rating=250V, Category="Headers and Wire Housings", ComponentLink1Description=https://datasheet.ciiva.com/7167/1865032-7167319.pdf?src-supplier=Newark, ComponentLink1URL=https://datasheet.ciiva.com/7167/1865032-7167319.pdf?src-supplier=Newark, Contact Material=Brass, Contact Mating Length=0.138inch, Contact Plating=Tin,Copper, Contact Type="Male Pin", Gender=Male, Glow Wire Compliant=Non-compliant, Housing Material=Nylon, Lead Free="Lead Free", Mounting Technology="Through Hole", Number of Circuits=5, Number of Contacts=6, Number of Positions=6, Number of Rows=1, Orientation=Straight, Packaging=Bulk, Pitch=2.5mm, Plating=Tin, Pricing="1=0,25, 10=0,207, 50=0,203, 100=0,17, 1000=0,138, 10000=0,135 (USD)", Radiation Hardening=No, Reach SVHC Compliant=Unknown, RoHS=Yes, RoHS Compliant=Yes, Series="SPOX™ 5267", Stock=10344, Supplier=Mouser, Termination=Solder, Voltage Rating (DC)=250V
R9: library part "RES 0.08 OHM 5% 1/8W 0805", "Low Ohmic Chip Resistor Thick Film 0805 80mOhm 5% Paper T/R", Case/Package=0805, Manufacturer=Yageo, Manufacturer Part Number=RL0805JR-070R08L, Max Operating Temperature=155°C, Max Power Dissipation=125mW, Min Operating Temperature=-55°C, Supplier Part Number=603-RL0805JR-070R08L, Temperature Coefficient=1000ppm/°C, Tolerance=5%, Category="Chip SMD Resistors", ComponentLink1Description=http://www.mouser.com/ds/2/447/PYu-RL_521_RoHS_L_5-2927.pdf?src-supplier=Mouser, ComponentLink1URL=http://www.mouser.com/ds/2/447/PYu-RL_521_RoHS_L_5-2927.pdf?src-supplier=Mouser, ComponentLink2Description=http://www.yageo.com/documents/recent/PYu-RL_Group_521_RoHS_L_2.pdf?src-supplier=Digikey, ComponentLink2URL=http://www.yageo.com/documents/recent/PYu-RL_Group_521_RoHS_L_2.pdf?src-supplier=Digikey, Features="Moisture Resistant", Height=0.024inch, Length=0.079inch, Number of Terminations=2, Packaging="Tape and Reel", Pricing="1=0,16, 10=0,119, 50=0,095, 100=0,084, 1000=0,061, 10000=0,036 (USD)", RoHS=Yes, Series=RL, Stock=4740, Supplier=Mouser, Width=0.049inch
U1: library part LM3478MAX/NOPB, Manufacturer="TI National Semiconductor", Supplier Part Number=926-LM3478MAX/NOPB, Category="Voltage Regulators - Switching", ComponentLink1Description=https://datasheet.ciiva.com/2021/lm3478-2021522.pdf?src-supplier=Digikey, ComponentLink1URL=https://datasheet.ciiva.com/2021/lm3478-2021522.pdf?src-supplier=Digikey, Manufacturer Part Number=LM3478MAX/NOPB, Pricing="1=2,34, 10=1,74, 50=1,59, 100=1,42, 1000=1,26, 10000=1,15 (USD)", RoHS=Yes, Stock=2561, Supplier=Mouser

## Via types
v1: diameter 0.8, hole 0.6, Top Layer to Bottom Layer, tented both sides, 120 vias
v2: diameter 0.7, hole 0.5, Top Layer to Bottom Layer, tented both sides, 12 vias

## Nets (pads, with @x,y where several pads share a name; then routed paths per layer and width w, separated by ;. In a path a pad name is that pad's centre, name@x,y a point inside that pad or via, vN(x,y) a via of type N, cw(c..) or ccw(c..) an arc to the next point about the centre after c; other vN are vias at no path point)
GND: C1.2 C2.2 C3.1 C4.2 C6.2 J1.1 J2.2 R1.1 R4.2 R4.3 R6.2 R7.2 R7.3 R9.2 U1.4 U1.5
  other v1: 1,1.225 4,1.225 7,1.225 16,1.225 19,1.225 22,1.225 25,1.225 28,1.225 31,1.225 34,1.225 37,1.225 40,1.225 43,1.225 46,1.225 2.5,4.225 5.5,4.225 38.5,4.225 41.5,4.225 44.5,4.225 47.5,4.225 1,7.225 4,7.225 7,7.225 28,7.225 31,7.225 34,7.225 43,7.225 46,7.225 2.5,10.225 5.5,10.225 8.5,10.225 14.5,10.225 26.5,10.225 29.5,10.225 32.5,10.225 35.5,10.225 41.5,10.225 44.5,10.225 47.5,10.225 1,13.225 4,13.225 16,13.225 37,13.225 43,13.225 46,13.225 2.5,16.225 35.5,16.225 41.5,16.225 44.5,16.225 47.5,16.225 1,19.225 4,19.225 34,19.225 37,19.225 43,19.225 46,19.225 2.5,22.225 5.5,22.225 8.5,22.225 11.5,22.225 41.5,22.225 44.5,22.225 47.5,22.225 43,25.225 46,25.225 41.5,28.225 44.5,28.225 47.5,28.225 19,31.225 22,31.225 25,31.225 28,31.225 31,31.225 34,31.225 37,31.225 43,31.225 46,31.225 8.5,34.225 17.5,34.225 20.5,34.225 23.5,34.225 26.5,34.225 29.5,34.225 1,37.225 4,37.225 7,37.225 10,37.225 13,37.225 16,37.225 19,37.225 22,37.225 25,37.225 28,37.225 2.5,40.225 5.5,40.225 8.5,40.225 11.5,40.225 14.5,40.225 17.5,40.225 20.5,40.225 23.5,40.225 26.5,40.225 29.5,40.225 32.5,40.225 1,43.225 4,43.225 7,43.225 10,43.225 13,43.225 16,43.225 19,43.225 22,43.225 25,43.225 28,43.225 31,43.225 34,43.225 37,43.225 40,43.225 43,43.225 46,43.225
  other v2: 11.325,14.35 29.075,14.875 7.525,15.75 25.592,15.738 32.35,15.925 15.775,17.275 21.2,17.35 18.5,23.925 12.85,33.875 38.35,39.9
NetC3_2: C3.2 C5.2 U1.2 | length 9.4
  Top Layer w0.508: C3.2 9.225,20.4 9.75,20.925 C5.2 12.106,20.925 12.109,20.922 U1.2
NetC5_1: C5.1 R1.2 | length 1.7
  Top Layer w0.508: R1.2 C5.1
NetC6_1: C6.1 Q1.S R9.1 U1.1 | length 19.3
  Top Layer w0.381: U1.1 v2(15.785,23.94) ; Q1.S 29.856,19.65 v2(30.3,19.65)
  Bottom Layer w0.381: v2(15.785,23.94) 20.075,19.65 v2(30.3,19.65)
NetD1_1: D1.1 L1.2 Q1.D
NetQ1_G: Q1.G R3.2 R6.1 | length 4.1
  Top Layer w0.508: R3.2 26.394,19.65 Q1.G R6.1
NetR2_1: R2.1 R4.1 | length 4
  Top Layer w0.508: R4.1 R2.1
NetR2_2: R2.2 R8.1 U1.3 | length 15.1
  Top Layer w0.508: U1.3 13.598,19.652 13.375,19.429 R2.2 15.3,12.075 16.05,11.325 R8.1
NetR3_1: R3.1 U1.6 | length 2.3
  Top Layer w0.508: U1.6 22.341,19.652 22.343,19.65 R3.1
NetR5_1: R5.1 U1.7 | length 7.8
  Top Layer w0.508: R5.1 17.6,16.606 18.55,17.556 18.55,20.15 19.322,20.922 U1.7
NetR5_2: R5.2 R7.1 | length 4
  Top Layer w0.508: R5.2 18.606,13.725 R7.1
Vin: C1.1 C4.1 J1.2 L1.1 U1.8
Vout: C2.1 D1.2 J2.1 R8.2 | length 51.3
  Top Layer w1.016: R8.2 16.175,7.025 18.648,4.552 36.052,4.552 39.425,7.925 39.425,33.477

## Polygon pours and split planes (outlines as drawn)
GND on Bottom Layer "GND_L02_P000" (solid, remove dead copper, pour order 0): 0.125,44.425 49.875,44.425 49.875,0 0.125,0
GND on Top Layer "GND_L01_P002" (solid, remove dead copper, pour order 2): 0.125,44.425 49.875,44.425 49.875,0 0.125,0

## Keep-outs
Keep-Out Layer:
  the board outline again, w0.254

## Other copper
Top Layer:
  region net NetC6_1: 28.475,20.14 28.475,17.075 31.475,17.075 31.725,17.325 31.725,19.8 31.475,20.14
  region net Vin: 1.525,29.175 10.725,29.175 10.9,29.35 21.625,29.35 22.525,30.25 24.65,30.25 25.075,29.825 25.075,23.85 23.1,21.875 20.325,21.875 20.325,22.95 20.738,23.362 20.75,23.475 20.75,24.6 20.1,25.25 1.575,25.25 1.525,25.3
  region net NetD1_1: 26.6,30.15 26.625,30.125 36.75,30.125 36.95,29.925 36.95,21.975 36.05,21.075 26.625,21.075
  region net Vout: 30.8,32.375 48.1,32.375 48.1,35.7 47.4,36.4 40.75,36.4 40.2,36.95 39.375,37.075 30.8,37.075

## Silkscreen, mask and mechanical layers (free items; w line width, h text height)
Top Overlay:
  drawing of 31 lines, arcs and shapes, not listed
  text "MEHMET ALI INANOGLU" at 2.302,39.532 h1.78
  text "Vout" at 41.674,30.765 h1.27
  text "VIN" at 3.048,23.965 h1.27
  text "LM3478 BOOST REGULATOR" at 18.193,1.388 h1.52
Bottom Overlay:
  text "(-)" at 43.036,37.981 h1.27
  text "(+)" at 43.061,34.456 h1.27
  text "(-)" at 3.636,30.956 h1.27
  text "(+)" at 3.611,27.431 h1.27